# Allegro board oh0.brd
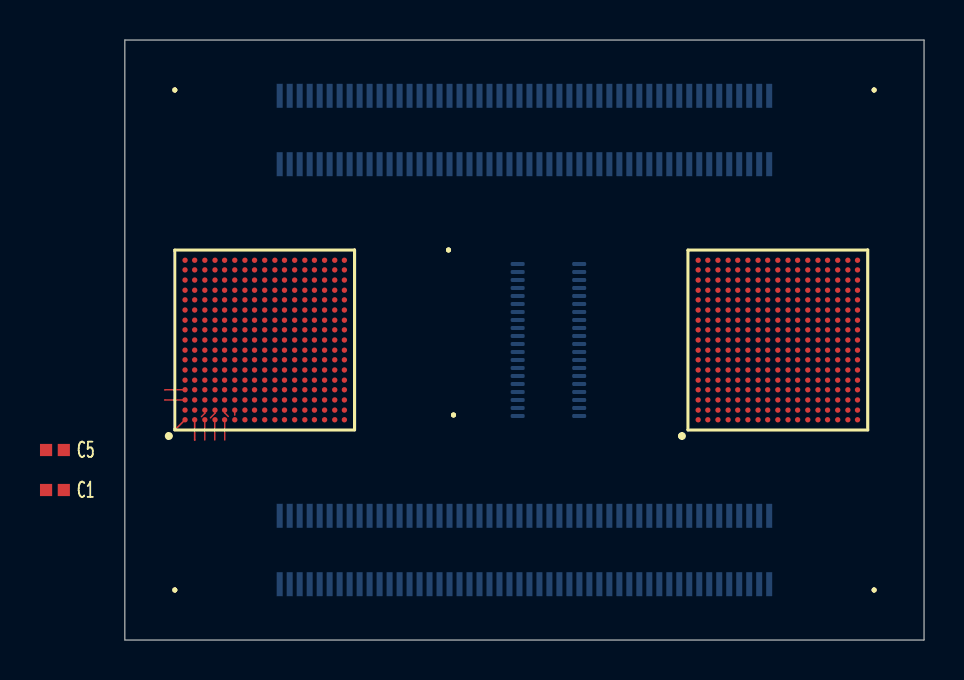
[diagram p0: board, top side]
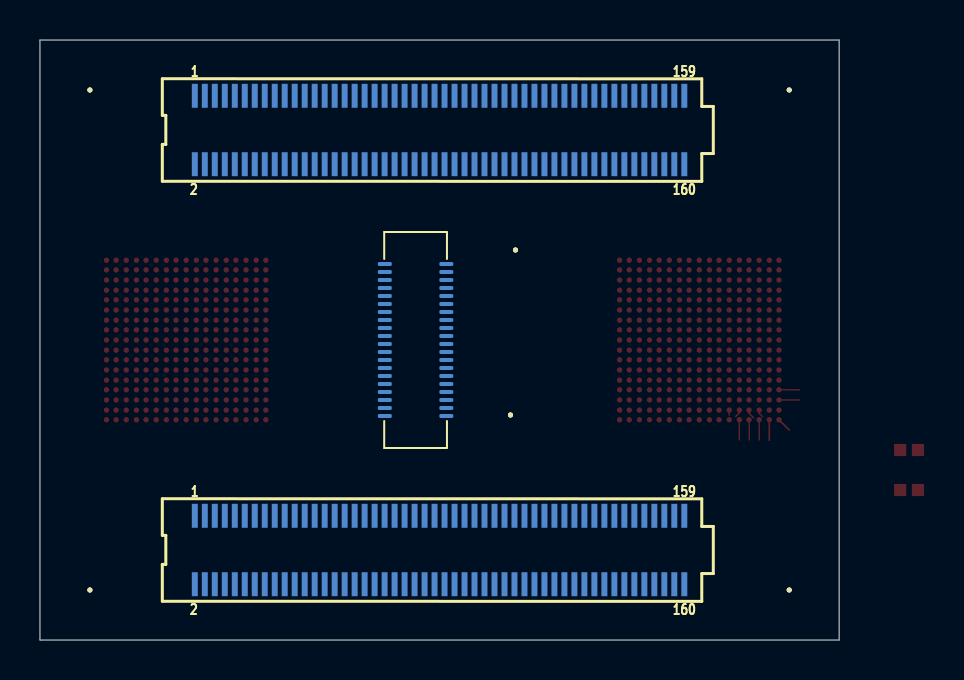
[diagram p1: board, bottom side, seen from below]

Outline 40 x 30 mm; copper layers: TOP, LAYER_1, LAYER_2, LAYER_3, LAYER_4, BOTTOM. Coordinates in mm from the lower left corner of the outline.
Outline path: 0,30 0,0 40,0 40,30 0,30

## Design rules (mm)
constraint set DEFAULT: min track width 0.082
net group DCLK0: nets DCLK_N0_LPGBTS1_LPGBT DCLK_P0_LPGBTS1_LPGBT1
net group DCLK1: nets DCLK_N1_LPGBTS1_LPGBT DCLK_P1_LPGBTS1_LPGBT1
net group DCLK2: nets DCLK_N2_LPGBTS1_LPGBT DCLK_P2_LPGBTS1_LPGBT1
net group DCLK3: nets DCLK_N3_LPGBTS1_LPGBT DCLK_P3_LPGBTS1_LPGBT1
net group DCLK4: nets DCLK_N4_LPGBTS1_LPGBT DCLK_P4_LPGBTS1_LPGBT1
net group DCLK5: nets DCLK_N5_LPGBTS1_LPGBT DCLK_P5_LPGBTS1_LPGBT1
net group DCLK6: nets DCLK_N6_LPGBTS1_LPGBT DCLK_P6_LPGBTS1_LPGBT1
net group DCLK7: nets DCLK_N7_LPGBTS1_LPGBT DCLK_P7_LPGBTS1_LPGBT1
net group DCLK8: nets DCLK_N8_LPGBTS1_LPGBT DCLK_P8_LPGBTS1_LPGBT1
net group DCLK9: nets DCLK_N9_LPGBTS1_LPGBT DCLK_P9_LPGBTS1_LPGBT1
net group DCLK10: nets DCLK_N10_LPGBTS1_LPGBT DCLK_P10_LPGBTS1_LPGBT1
net group DCLK11: nets DCLK_N11_LPGBTS1_LPGBT DCLK_P11_LPGBTS1_LPGBT1
net group DCLK12: nets DCLK_N12_LPGBTS1_LPGBT DCLK_P12_LPGBTS1_LPGBT1
net group DCLK13: nets DCLK_N13_LPGBTS1_LPGBT DCLK_P13_LPGBTS1_LPGBT1
net group DCLK14: nets DCLK_N14_LPGBTS1_LPGBT DCLK_P14_LPGBTS1_LPGBT1
net group DCLK15: nets DCLK_N15_LPGBTS1_LPGBT DCLK_P15_LPGBTS1_LPGBT1
net group DCLK16: nets DCLK_N16_LPGBTS1_LPGBT DCLK_P16_LPGBTS1_LPGBT1
net group DCLK17: nets DCLK_N17_LPGBTS1_LPGBT DCLK_P17_LPGBTS1_LPGBT1
net group DCLK18: nets DCLK_N18_LPGBTS1_LPGBT DCLK_P18_LPGBTS1_LPGBT1
net group DCLK19: nets DCLK_N19_LPGBTS1_LPGBT DCLK_P19_LPGBTS1_LPGBT1
net group DCLK20: nets DCLK_N20_LPGBTS1_LPGBT DCLK_P20_LPGBTS1_LPGBT1
net group DCLK21: nets DCLK_N21_LPGBTS1_LPGBT DCLK_P21_LPGBTS1_LPGBT1
net group DCLK22: nets DCLK_N22_LPGBTS1_LPGBT DCLK_P22_LPGBTS1_LPGBT1
net group DCLK23: nets DCLK_N23_LPGBTS1_LPGBT DCLK_P23_LPGBTS1_LPGBT1
net group DCLK24: nets DCLK_N24_LPGBTS1_LPGBT DCLK_P24_LPGBTS1_LPGBT1
net group DCLK25: nets DCLK_N25_LPGBTS1_LPGBT DCLK_P25_LPGBTS1_LPGBT1
net group DCLK26: nets DCLK_N26_LPGBTS1_LPGBT DCLK_P26_LPGBTS1_LPGBT1
net group DCLK27: nets DCLK_N27_LPGBTS1_LPGBT DCLK_P27_LPGBTS1_LPGBT1
net group ELINK_I_MASTER0: nets ELINK_I_MASTER_N0 ELINK_I_MASTER_P0
net group ELINK_I_MASTER1: nets ELINK_I_MASTER_N1 ELINK_I_MASTER_P1
net group ELINK_I_MASTER2: nets ELINK_I_MASTER_N2 ELINK_I_MASTER_P2
net group ELINK_I_MASTER3: nets ELINK_I_MASTER_N3 ELINK_I_MASTER_P3
net group ELINK_I_MASTER4: nets ELINK_I_MASTER_N4 ELINK_I_MASTER_P4
net group ELINK_I_MASTER5: nets ELINK_I_MASTER_N5 ELINK_I_MASTER_P5
net group ELINK_I_MASTER6: nets ELINK_I_MASTER_N6 ELINK_I_MASTER_P6
net group ELINK_I_MASTER7: nets ELINK_I_MASTER_N7 ELINK_I_MASTER_P7
net group ELINK_I_MASTER8: nets ELINK_I_MASTER_N8 ELINK_I_MASTER_P8
net group ELINK_I_MASTER9: nets ELINK_I_MASTER_N9 ELINK_I_MASTER_P9
net group ELINK_I_MASTER10: nets ELINK_I_MASTER_N10 ELINK_I_MASTER_P10
net group ELINK_I_MASTER11: nets ELINK_I_MASTER_N11 ELINK_I_MASTER_P11
net group ELINK_I_MASTER12: nets ELINK_I_MASTER_N12 ELINK_I_MASTER_P12
net group ELINK_I_MASTER13: nets ELINK_I_MASTER_N13 ELINK_I_MASTER_P13
net group ELINK_I_MASTER14: nets ELINK_I_MASTER_N14 ELINK_I_MASTER_P14
net group ELINK_I_MASTER15: nets ELINK_I_MASTER_N15 ELINK_I_MASTER_P15
net group ELINK_I_MASTER16: nets ELINK_I_MASTER_N16 ELINK_I_MASTER_P16
net group ELINK_I_MASTER17: nets ELINK_I_MASTER_N17 ELINK_I_MASTER_P17
net group ELINK_I_MASTER18: nets ELINK_I_MASTER_N18 ELINK_I_MASTER_P18
net group ELINK_I_MASTER19: nets ELINK_I_MASTER_N19 ELINK_I_MASTER_P19
net group ELINK_I_MASTER20: nets ELINK_I_MASTER_N20 ELINK_I_MASTER_P20
net group ELINK_I_MASTER21: nets ELINK_I_MASTER_N21 ELINK_I_MASTER_P21
net group ELINK_I_MASTER22: nets ELINK_I_MASTER_N22 ELINK_I_MASTER_P22
net group ELINK_I_MASTER23: nets ELINK_I_MASTER_N23 ELINK_I_MASTER_P23
net group ELINK_I_MASTER24: nets ELINK_I_MASTER_N24 ELINK_I_MASTER_P24
net group ELINK_I_MASTER25: nets ELINK_I_MASTER_N25 ELINK_I_MASTER_P25
net group ELINK_I_MASTER26: nets ELINK_I_MASTER_N26 ELINK_I_MASTER_P26
net group ELINK_I_MASTER27: nets ELINK_I_MASTER_N27 ELINK_I_MASTER_P27
net group ELINK_I_SLAVE0: nets ELINK_I_SLAVE_N0 ELINK_I_SLAVE_P0
net group ELINK_I_SLAVE1: nets ELINK_I_SLAVE_N1 ELINK_I_SLAVE_P1
net group ELINK_I_SLAVE2: nets ELINK_I_SLAVE_N2 ELINK_I_SLAVE_P2
net group ELINK_I_SLAVE3: nets ELINK_I_SLAVE_N3 ELINK_I_SLAVE_P3
net group ELINK_I_SLAVE4: nets ELINK_I_SLAVE_N4 ELINK_I_SLAVE_P4
net group ELINK_I_SLAVE5: nets ELINK_I_SLAVE_N5 ELINK_I_SLAVE_P5
net group ELINK_I_SLAVE6: nets ELINK_I_SLAVE_N6 ELINK_I_SLAVE_P6
net group ELINK_I_SLAVE7: nets ELINK_I_SLAVE_N7 ELINK_I_SLAVE_P7
net group ELINK_I_SLAVE8: nets ELINK_I_SLAVE_N8 ELINK_I_SLAVE_P8
net group ELINK_I_SLAVE9: nets ELINK_I_SLAVE_N9 ELINK_I_SLAVE_P9
net group ELINK_I_SLAVE10: nets ELINK_I_SLAVE_N10 ELINK_I_SLAVE_P10
net group ELINK_I_SLAVE11: nets ELINK_I_SLAVE_N11 ELINK_I_SLAVE_P11
net group ELINK_I_SLAVE12: nets ELINK_I_SLAVE_N12 ELINK_I_SLAVE_P12
net group ELINK_I_SLAVE13: nets ELINK_I_SLAVE_N13 ELINK_I_SLAVE_P13
net group ELINK_I_SLAVE14: nets ELINK_I_SLAVE_N14 ELINK_I_SLAVE_P14
net group ELINK_I_SLAVE15: nets ELINK_I_SLAVE_N15 ELINK_I_SLAVE_P15
net group ELINK_I_SLAVE16: nets ELINK_I_SLAVE_N16 ELINK_I_SLAVE_P16
net group ELINK_I_SLAVE17: nets ELINK_I_SLAVE_N17 ELINK_I_SLAVE_P17
net group ELINK_I_SLAVE18: nets ELINK_I_SLAVE_N18 ELINK_I_SLAVE_P18
net group ELINK_I_SLAVE19: nets ELINK_I_SLAVE_N19 ELINK_I_SLAVE_P19
net group ELINK_I_SLAVE20: nets ELINK_I_SLAVE_N20 ELINK_I_SLAVE_P20
net group ELINK_I_SLAVE21: nets ELINK_I_SLAVE_N21 ELINK_I_SLAVE_P21
net group ELINK_I_SLAVE22: nets ELINK_I_SLAVE_N22 ELINK_I_SLAVE_P22
net group ELINK_I_SLAVE23: nets ELINK_I_SLAVE_N23 ELINK_I_SLAVE_P23
net group ELINK_I_SLAVE24: nets ELINK_I_SLAVE_N24 ELINK_I_SLAVE_P24
net group ELINK_I_SLAVE25: nets ELINK_I_SLAVE_N25 ELINK_I_SLAVE_P25
net group ELINK_I_SLAVE26: nets ELINK_I_SLAVE_N26 ELINK_I_SLAVE_P26
net group ELINK_I_SLAVE27: nets ELINK_I_SLAVE_N27 ELINK_I_SLAVE_P27
net group ELINK_O0: nets ELINK_O_P0_LPGBTS1 ELINK_O_P0_LPGBTS1_LPGBT1
net group ELINK_O1: nets ELINK_O_P1_LPGBTS1 ELINK_O_P1_LPGBTS1_LPGBT1
net group ELINK_O2: nets ELINK_O_P2_LPGBTS1 ELINK_O_P2_LPGBTS1_LPGBT1
net group ELINK_O3: nets ELINK_O_P3_LPGBTS1 ELINK_O_P3_LPGBTS1_LPGBT1
net group ELINK_O4: nets ELINK_O_P4_LPGBTS1 ELINK_O_P4_LPGBTS1_LPGBT1
net group ELINK_O5: nets ELINK_O_P5_LPGBTS1 ELINK_O_P5_LPGBTS1_LPGBT1
net group ELINK_O6: nets ELINK_O_P6_LPGBTS1 ELINK_O_P6_LPGBTS1_LPGBT1
net group ELINK_O7: nets ELINK_O_P7_LPGBTS1 ELINK_O_P7_LPGBTS1_LPGBT1
net group ELINK_O8: nets ELINK_O_P8_LPGBTS1 ELINK_O_P8_LPGBTS1_LPGBT1
net group ELINK_O9: nets ELINK_O_P9_LPGBTS1 ELINK_O_P9_LPGBTS1_LPGBT1
net group ELINK_O10: nets ELINK_O_P10_LPGBTS1 ELINK_O_P10_LPGBTS1_LPGBT1
net group ELINK_O11: nets ELINK_O_P11_LPGBTS1 ELINK_O_P11_LPGBTS1_LPGBT1
net group ELINK_O12: nets ELINK_O_P12_LPGBTS1 ELINK_O_P12_LPGBTS1_LPGBT1
net group ELINK_O13: nets ELINK_O_P13_LPGBTS1 ELINK_O_P13_LPGBTS1_LPGBT1
net group ELINK_O14: nets ELINK_O_P14_LPGBTS1 ELINK_O_P14_LPGBTS1_LPGBT1
net group ELINK_O15: nets ELINK_O_P15_LPGBTS1 ELINK_O_P15_LPGBTS1_LPGBT1
net group MASTER_CLOCK0: nets MASTER_CLOCK_P0_BASEBOARD MASTER_CLOCK_P0_LPGBTS1
net group MASTER_CLOCK1: nets MASTER_CLOCK_P1_BASEBOARD MASTER_CLOCK_P1_LPGBTS1
net group MASTER_CLOCK2: nets MASTER_CLOCK_P2_BASEBOARD MASTER_CLOCK_P2_LPGBTS1
net group MASTER_TX: nets MASTER_TX_N MASTER_TX_P
net group REFCLK: nets REFCLK_N REFCLK_P
net group RX: nets RX_N RX_P
net group SCIN: nets SCIN_N SCIN_P
net group SCOUT: nets SCOUT_N SCOUT_P
net group SLAVE_CLOCK1: nets SLAVE_CLOCK_N1 SLAVE_CLOCK_P1
net group SLAVE_CLOCK2: nets SLAVE_CLOCK_N2 SLAVE_CLOCK_P2
net group SLAVE_TX: nets SLAVE_TX_N SLAVE_TX_P
net group SLOW_CONTROL: nets SLOW_CONTROL_N SLOW_CONTROL_P
net group ELINKS: nets ELINK_O_N0_LPGBTS1 ELINK_O_N0_LPGBTS1_LPGBT1 ELINK_O_N1_LPGBTS1 ELINK_O_N1_LPGBTS1_LPGBT1 ELINK_O_N2_LPGBTS1 ELINK_O_N2_LPGBTS1_LPGBT1 ELINK_O_N3_LPGBTS1 ELINK_O_N3_LPGBTS1_LPGBT1 ELINK_O_N4_LPGBTS1 ELINK_O_N4_LPGBTS1_LPGBT1 ELINK_O_N5_LPGBTS1 ELINK_O_N5_LPGBTS1_LPGBT1 ELINK_O_N6_LPGBTS1 ELINK_O_N6_LPGBTS1_LPGBT1 ELINK_O_N7_LPGBTS1 ELINK_O_N7_LPGBTS1_LPGBT1 ELINK_O_N8_LPGBTS1 ELINK_O_N8_LPGBTS1_LPGBT1 ELINK_O_N9_LPGBTS1 ELINK_O_N9_LPGBTS1_LPGBT1 ELINK_O_N10_LPGBTS1 ELINK_O_N10_LPGBTS1_LPGBT1 ELINK_O_N11_LPGBTS1 ELINK_O_N11_LPGBTS1_LPGBT1 ELINK_O_N12_LPGBTS1 ELINK_O_N12_LPGBTS1_LPGBT1 ELINK_O_N13_LPGBTS1 ELINK_O_N13_LPGBTS1_LPGBT1 ELINK_O_N14_LPGBTS1 ELINK_O_N14_LPGBTS1_LPGBT1 ELINK_O_N15_LPGBTS1 ELINK_O_N15_LPGBTS1_LPGBT1

## Placement (name value [footprint] x y rotation side)
C1  4.7 uF  [C0402]  -3.5 7.5 0 top
C5  4.7 uF  [C0402]  -3.5 9.5 0 top
J3  VTRX+  [DF40C-2P0-40DS]  21.2 15 180 bottom
J4  ST5-50-1.50-L-D-P  [ST5-50-1_50-X-D]  20 4.5 180 bottom
J5  ST5-50-1.50-L-D-P  [ST5-50-1_50-X-D]  20 25.5 180 bottom
M1  -  [SMTSO-M1-2ET]  16.2 19.5 270 bottom
M2  -  [SMTSO-M1-2ET]  16.45 11.25 270 bottom
NOREF  -  []  0 30 0 top
NOREF#2  -  []  0 0 90 top
NOREF#3  -  [unnamed#2]  2.5 27.5 180 bottom
NOREF#4  -  [unnamed#2]  37.5 2.5 180 bottom
NOREF#5  -  [unnamed#2]  37.5 27.5 180 bottom
NOREF#6  -  [unnamed#2]  2.5 2.5 180 bottom
U1  LpGBT  [LPGBT_WIZ]  32.68 15 180 top
U2  LpGBT  [LPGBT_WIZ]  7 15 180 top

## Library data of the parts
C1 C5 = CAP NP
J3 = VTRX+
J4 J5 = ST5-50-X-Y-Z
M1 M2 = SMTSO-M1-2ET
U1 U2 = LpGBT

## Footprints (pads in the part's own frame, mm; a bottom-side part is the same pattern mirrored in y, then rotated)
C0402
  rect 0.61x0.61 smd: 1(-0.445,0) 2(0.445,0)
DF40C-2P0-40DS
  rrect 0.7x0.2 smd: 1(-1.54,3.8) 2(1.54,3.8) 3(-1.54,3.4) 4(1.54,3.4) 5(-1.54,3) 6(1.54,3) 7(-1.54,2.6) 8(1.54,2.6) 9(-1.54,2.2) 10(1.54,2.2) 11(-1.54,1.8) 12(1.54,1.8) 13(-1.54,1.4) 14(1.54,1.4) 15(-1.54,1) 16(1.54,1) 17(-1.54,0.6) 18(1.54,0.6) 19(-1.54,0.2) 20(1.54,0.2) 21(-1.54,-0.2) 22(1.54,-0.2) 23(-1.54,-0.6) 24(1.54,-0.6) 25(-1.54,-1) 26(1.54,-1) 27(-1.54,-1.4) 28(1.54,-1.4) 29(-1.54,-1.8) 30(1.54,-1.8) 31(-1.54,-2.2) 32(1.54,-2.2) 33(-1.54,-2.6) 34(1.54,-2.6) 35(-1.54,-3) 36(1.54,-3) 37(-1.54,-3.4) 38(1.54,-3.4) 39(-1.54,-3.8) 40(1.54,-3.8)
LPGBT_WIZ
  round 0.269 smd: A1(3.988,3.988) A2(3.505,3.988) A3(2.997,3.988) A4(2.489,3.988) A5(2.007,3.988) A6(1.499,3.988) A7(0.991,3.988) A8(0.508,3.988) A9(0,3.988) A10(-0.508,3.988) A11(-0.991,3.988) A12(-1.499,3.988) A13(-2.007,3.988) A14(-2.489,3.988) A15(-2.997,3.988) A16(-3.505,3.988) A17(-3.988,3.988) B1(3.988,3.505) B2(3.505,3.505) B3(2.997,3.505) B4(2.489,3.505) B5(2.007,3.505) B6(1.499,3.505) B7(0.991,3.505) B8(0.508,3.505) B9(0,3.505) B10(-0.508,3.505) B11(-0.991,3.505) B12(-1.499,3.505) B13(-2.007,3.505) B14(-2.489,3.505) B15(-2.997,3.505) B16(-3.505,3.505) B17(-3.988,3.505) C1(3.988,2.997) C2(3.505,2.997) C3(2.997,2.997) C4(2.489,2.997) C5(2.007,2.997) C6(1.499,2.997) C7(0.991,2.997) C8(0.508,2.997) C9(0,2.997) C10(-0.508,2.997) C11(-0.991,2.997) C12(-1.499,2.997) C13(-2.007,2.997) C14(-2.489,2.997) C15(-2.997,2.997) C16(-3.505,2.997) C17(-3.988,2.997) D1(3.988,2.489) D2(3.505,2.489) D3(2.997,2.489) D4(2.489,2.489) D5(2.007,2.489) D6(1.499,2.489) D7(0.991,2.489) D8(0.508,2.489) D9(0,2.489) D10(-0.508,2.489) D11(-0.991,2.489) D12(-1.499,2.489) D13(-2.007,2.489) D14(-2.489,2.489) D15(-2.997,2.489) D16(-3.505,2.489) D17(-3.988,2.489) E1(3.988,2.007) E2(3.505,2.007) E3(2.997,2.007) E4(2.489,2.007) E5(2.007,2.007) E6(1.499,2.007) E7(0.991,2.007) E8(0.508,2.007) E9(0,2.007) E10(-0.508,2.007) E11(-0.991,2.007) E12(-1.499,2.007) E13(-2.007,2.007) E14(-2.489,2.007) E15(-2.997,2.007) E16(-3.505,2.007) E17(-3.988,2.007) F1(3.988,1.499) F2(3.505,1.499) F3(2.997,1.499) F4(2.489,1.499) F5(2.007,1.499) F6(1.499,1.499) F7(0.991,1.499) F8(0.508,1.499) F9(0,1.499) F10(-0.508,1.499) F11(-0.991,1.499) F12(-1.499,1.499) F13(-2.007,1.499) F14(-2.489,1.499) F15(-2.997,1.499) F16(-3.505,1.499) F17(-3.988,1.499) G1(3.988,0.991) G2(3.505,0.991) G3(2.997,0.991) G4(2.489,0.991) G5(2.007,0.991) G6(1.499,0.991) G7(0.991,0.991) G8(0.508,0.991) G9(0,0.991) G10(-0.508,0.991) G11(-0.991,0.991) G12(-1.499,0.991) G13(-2.007,0.991) G14(-2.489,0.991) G15(-2.997,0.991) G16(-3.505,0.991) G17(-3.988,0.991) H1(3.988,0.508) H2(3.505,0.508) H3(2.997,0.508) H4(2.489,0.508) H5(2.007,0.508) H6(1.499,0.508) H7(0.991,0.508) H8(0.508,0.508) H9(0,0.508) H10(-0.508,0.508) H11(-0.991,0.508) H12(-1.499,0.508) H13(-2.007,0.508) H14(-2.489,0.508) H15(-2.997,0.508) H16(-3.505,0.508) H17(-3.988,0.508) J1(3.988,0) J2(3.505,0) J3(2.997,0) J4(2.489,0) J5(2.007,0) J6(1.499,0) J7(0.991,0) J8(0.508,0) J9(0,0) J10(-0.508,0) J11(-0.991,0) J12(-1.499,0) J13(-2.007,0) J14(-2.489,0) J15(-2.997,0) J16(-3.505,0) J17(-3.988,0) K1(3.988,-0.508) K2(3.505,-0.508) K3(2.997,-0.508) K4(2.489,-0.508) K5(2.007,-0.508) K6(1.499,-0.508) K7(0.991,-0.508) K8(0.508,-0.508) K9(0,-0.508) K10(-0.508,-0.508) K11(-0.991,-0.508) K12(-1.499,-0.508) K13(-2.007,-0.508) K14(-2.489,-0.508) K15(-2.997,-0.508) K16(-3.505,-0.508) K17(-3.988,-0.508) L1(3.988,-0.991) L2(3.505,-0.991) L3(2.997,-0.991) L4(2.489,-0.991) L5(2.007,-0.991) L6(1.499,-0.991) L7(0.991,-0.991) L8(0.508,-0.991) L9(0,-0.991) L10(-0.508,-0.991) L11(-0.991,-0.991) L12(-1.499,-0.991) L13(-2.007,-0.991) L14(-2.489,-0.991) L15(-2.997,-0.991) L16(-3.505,-0.991) L17(-3.988,-0.991) M1(3.988,-1.499) M2(3.505,-1.499) M3(2.997,-1.499) M4(2.489,-1.499) M5(2.007,-1.499) M6(1.499,-1.499) M7(0.991,-1.499) M8(0.508,-1.499) M9(0,-1.499) M10(-0.508,-1.499) M11(-0.991,-1.499) M12(-1.499,-1.499) M13(-2.007,-1.499) M14(-2.489,-1.499) M15(-2.997,-1.499) M16(-3.505,-1.499) M17(-3.988,-1.499) N1(3.988,-2.007) N2(3.505,-2.007) N3(2.997,-2.007) N4(2.489,-2.007) N5(2.007,-2.007) N6(1.499,-2.007) N7(0.991,-2.007) N8(0.508,-2.007) N9(0,-2.007) N10(-0.508,-2.007) N11(-0.991,-2.007) N12(-1.499,-2.007) N13(-2.007,-2.007) N14(-2.489,-2.007) N15(-2.997,-2.007) N16(-3.505,-2.007) N17(-3.988,-2.007) P1(3.988,-2.489) P2(3.505,-2.489) P3(2.997,-2.489) P4(2.489,-2.489) P5(2.007,-2.489) P6(1.499,-2.489) P7(0.991,-2.489) P8(0.508,-2.489) P9(0,-2.489) P10(-0.508,-2.489) P11(-0.991,-2.489) P12(-1.499,-2.489) P13(-2.007,-2.489) P14(-2.489,-2.489) P15(-2.997,-2.489) P16(-3.505,-2.489) P17(-3.988,-2.489) R1(3.988,-2.997) R2(3.505,-2.997) R3(2.997,-2.997) R4(2.489,-2.997) R5(2.007,-2.997) R6(1.499,-2.997) R7(0.991,-2.997) R8(0.508,-2.997) R9(0,-2.997) R10(-0.508,-2.997) R11(-0.991,-2.997) R12(-1.499,-2.997) R13(-2.007,-2.997) R14(-2.489,-2.997) R15(-2.997,-2.997) R16(-3.505,-2.997) R17(-3.988,-2.997) T1(3.988,-3.505) T2(3.505,-3.505) T3(2.997,-3.505) T4(2.489,-3.505) T5(2.007,-3.505) T6(1.499,-3.505) T7(0.991,-3.505) T8(0.508,-3.505) T9(0,-3.505) T10(-0.508,-3.505) T11(-0.991,-3.505) T12(-1.499,-3.505) T13(-2.007,-3.505) T14(-2.489,-3.505) T15(-2.997,-3.505) T16(-3.505,-3.505) T17(-3.988,-3.505) U1(3.988,-3.988) U2(3.505,-3.988) U3(2.997,-3.988) U4(2.489,-3.988) U5(2.007,-3.988) U6(1.499,-3.988) U7(0.991,-3.988) U8(0.508,-3.988) U9(0,-3.988) U10(-0.508,-3.988) U11(-0.991,-3.988) U12(-1.499,-3.988) U13(-2.007,-3.988) U14(-2.489,-3.988) U15(-2.997,-3.988) U16(-3.505,-3.988) U17(-3.988,-3.988)
SMTSO-M1-2ET
  round 0.254 hole 2.489: 1(0,0)
ST5-50-1_50-X-D
  rect 0.3x1.2 smd: 1(-12.25,1.71) 2(-12.25,-1.71) 3(-11.75,1.71) 4(-11.75,-1.71) 5(-11.25,1.71) 6(-11.25,-1.71) 7(-10.75,1.71) 8(-10.75,-1.71) 9(-10.25,1.71) 10(-10.25,-1.71) 11(-9.75,1.71) 12(-9.75,-1.71) 13(-9.25,1.71) 14(-9.25,-1.71) 15(-8.75,1.71) 16(-8.75,-1.71) 17(-8.25,1.71) 18(-8.25,-1.71) 19(-7.75,1.71) 20(-7.75,-1.71) 21(-7.25,1.71) 22(-7.25,-1.71) 23(-6.75,1.71) 24(-6.75,-1.71) 25(-6.25,1.71) 26(-6.25,-1.71) 27(-5.75,1.71) 28(-5.75,-1.71) 29(-5.25,1.71) 30(-5.25,-1.71) 31(-4.75,1.71) 32(-4.75,-1.71) 33(-4.25,1.71) 34(-4.25,-1.71) 35(-3.75,1.71) 36(-3.75,-1.71) 37(-3.25,1.71) 38(-3.25,-1.71) 39(-2.75,1.71) 40(-2.75,-1.71) 41(-2.25,1.71) 42(-2.25,-1.71) 43(-1.75,1.71) 44(-1.75,-1.71) 45(-1.25,1.71) 46(-1.25,-1.71) 47(-0.75,1.71) 48(-0.75,-1.71) 49(-0.25,1.71) 50(-0.25,-1.71) 51(0.25,1.71) 52(0.25,-1.71) 53(0.75,1.71) 54(0.75,-1.71) 55(1.25,1.71) 56(1.25,-1.71) 57(1.75,1.71) 58(1.75,-1.71) 59(2.25,1.71) 60(2.25,-1.71) 61(2.75,1.71) 62(2.75,-1.71) 63(3.25,1.71) 64(3.25,-1.71) 65(3.75,1.71) 66(3.75,-1.71) 67(4.25,1.71) 68(4.25,-1.71) 69(4.75,1.71) 70(4.75,-1.71) 71(5.25,1.71) 72(5.25,-1.71) 73(5.75,1.71) 74(5.75,-1.71) 75(6.25,1.71) 76(6.25,-1.71) 77(6.75,1.71) 78(6.75,-1.71) 79(7.25,1.71) 80(7.25,-1.71) 81(7.75,1.71) 82(7.75,-1.71) 83(8.25,1.71) 84(8.25,-1.71) 85(8.75,1.71) 86(8.75,-1.71) 87(9.25,1.71) 88(9.25,-1.71) 89(9.75,1.71) 90(9.75,-1.71) 91(10.25,1.71) 92(10.25,-1.71) 93(10.75,1.71) 94(10.75,-1.71) 95(11.25,1.71) 96(11.25,-1.71) 97(11.75,1.71) 98(11.75,-1.71) 99(12.25,1.71) 100(12.25,-1.71)
unnamed#2
  round 0.254 hole 2.489: 1(0,0)

## Nets
+1V2: C5.1 J4.26 J4.28 J4.30 J4.32 J4.34 J4.36 J4.38 J4.40 U1.F3 U1.G3 U1.H3 U1.J3 U1.J5 U1.J6 U1.J7 U1.J8 U1.J9 U1.J11 U1.K3 U1.K6 U1.K7 U1.K8 U1.K9 U1.K11 U1.K12 U1.K13 U1.L3 U1.L10 U1.L11 U1.L12 U1.L13 U1.M3 U1.M12 U1.M13 U1.N3 U2.F3 U2.G3 U2.H3 U2.J3 U2.J5 U2.J6 U2.J7 U2.J8 U2.J9 U2.J11 U2.K3 U2.K6 U2.K7 U2.K8 U2.K9 U2.K11 U2.K12 U2.K13 U2.L3 U2.L10 U2.L11 U2.L12 U2.L13 U2.M3 U2.M12 U2.M13 U2.N3
+2V5: J4.58 J4.60 J4.62 J4.64 J4.66 J4.68 J4.70 J4.72
GND: C1.2 C5.2 J4.14 J4.24 J4.42 J4.43 J4.44 J4.46 J4.48 J4.49 J4.50 J4.52 J4.54 J4.56 J4.74 J4.76 J4.78 J4.80 J4.82 J4.84 J4.86 J4.88 J4.93 J4.99 J5.43 J5.44 J5.49 J5.50 J5.94 J5.99 U1.F1 U1.F2 U1.F4 U1.G2 U1.G4 U1.G6 U1.G7 U1.G8 U1.G9 U1.G10 U1.G11 U1.G12 U1.G13 U1.H2 U1.H5 U1.H6 U1.H7 U1.H8 U1.H9 U1.H10 U1.H11 U1.H12 U1.H13 U1.J1 U1.J2(VSSTX#J2) U1.J12 U1.J13 U1.K1 U1.K2 U1.L2 U1.M2 U1.N1 U1.N2 U2.F1 U2.F2 U2.F4 U2.G2 U2.G4 U2.G6 U2.G7 U2.G8 U2.G9 U2.G10 U2.G11 U2.G12 U2.G13 U2.H2 U2.H5 U2.H6 U2.H7 U2.H8 U2.H9 U2.H10 U2.H11 U2.H12 U2.H13 U2.J1 U2.J2(VSSTX#J2) U2.J12 U2.J13 U2.K1 U2.K2 U2.L2 U2.M2 U2.N1 U2.N2
GND_SIGNAL: J3.5 J3.6 J3.11 J3.12 J3.17 J3.18 J3.23 J3.24 J3.29 J3.30 J3.35 J3.36 M1.1 M2.1
VDDADC: U1.E3 U1.E4 U2.E3 U2.E4
ADC_IN0: U1.D1
ADC_IN0_LPGBTS1_LPGBT1: U2.A2
ADC_IN1: J3.4 U1.C1
ADC_IN1_LPGBTS1_LPGBT1: U2.A1
ADC_IN2: U1.C2
ADC_IN2_LPGBTS1_LPGBT1: U2.B2
ADC_IN3: U1.C3
ADC_IN3_LPGBTS1_LPGBT1: U2.B1
ADC_IN4: J4.16 U1.B1
ADC_IN4_LPGBTS1_LPGBT1: U2.C3
ADC_IN5: J4.18 U1.B2
ADC_IN5_LPGBTS1_LPGBT1: U2.C2
ADC_IN6: J4.20 U1.A1
ADC_IN6_LPGBTS1_LPGBT1: U2.C1
ADC_IN7: J4.22 U1.A2
ADC_IN7_LPGBTS1_LPGBT1: U2.D1
DAC_OUT: U1.D2
DCLK_N0_LPGBTS1_LPGBT: U1.U4
DCLK_N0_LPGBTS1_LPGBT1: U2.U4
DCLK_N1_LPGBTS1_LPGBT: U1.R4
DCLK_N1_LPGBTS1_LPGBT1: U2.R4
DCLK_N2_LPGBTS1_LPGBT: U1.U9
DCLK_N2_LPGBTS1_LPGBT1: U2.U9
DCLK_N3_LPGBTS1_LPGBT: U1.U10
DCLK_N3_LPGBTS1_LPGBT1: U2.U10
DCLK_N4_LPGBTS1_LPGBT: U1.R13
DCLK_N4_LPGBTS1_LPGBT1: U2.R13
DCLK_N5_LPGBTS1_LPGBT: U1.R14
DCLK_N5_LPGBTS1_LPGBT1: U2.R14
DCLK_N6_LPGBTS1_LPGBT: U1.U15
DCLK_N6_LPGBTS1_LPGBT1: U2.U15
DCLK_N7_LPGBTS1_LPGBT: U1.R15
DCLK_N7_LPGBTS1_LPGBT1: U2.R15
DCLK_N8_LPGBTS1_LPGBT: U1.N15
DCLK_N8_LPGBTS1_LPGBT1: U2.N15
DCLK_N9_LPGBTS1_LPGBT: U1.M15
DCLK_N9_LPGBTS1_LPGBT1: U2.M15
DCLK_N10_LPGBTS1_LPGBT: U1.L15
DCLK_N10_LPGBTS1_LPGBT1: U2.L15
DCLK_N11_LPGBTS1_LPGBT: U1.K17
DCLK_N11_LPGBTS1_LPGBT1: U2.K17
DCLK_N12_LPGBTS1_LPGBT: U1.J17
DCLK_N12_LPGBTS1_LPGBT1: U2.J17
DCLK_N13_LPGBTS1_LPGBT: U1.K15
DCLK_N13_LPGBTS1_LPGBT1: U2.K15
DCLK_N14_LPGBTS1_LPGBT: U1.J15
DCLK_N14_LPGBTS1_LPGBT1: U2.J15
DCLK_N15_LPGBTS1_LPGBT: U1.H15
DCLK_N15_LPGBTS1_LPGBT1: U2.H15
DCLK_N16_LPGBTS1_LPGBT: U1.G15
DCLK_N16_LPGBTS1_LPGBT1: U2.G15
DCLK_N17_LPGBTS1_LPGBT: U1.F15
DCLK_N17_LPGBTS1_LPGBT1: U2.F15
DCLK_N18_LPGBTS1_LPGBT: U1.E15
DCLK_N18_LPGBTS1_LPGBT1: U2.E15
DCLK_N19_LPGBTS1_LPGBT: U1.D17
DCLK_N19_LPGBTS1_LPGBT1: U2.D17
DCLK_N20_LPGBTS1_LPGBT: U1.D15
DCLK_N20_LPGBTS1_LPGBT1: U2.D15
DCLK_N21_LPGBTS1_LPGBT: U1.C17
DCLK_N21_LPGBTS1_LPGBT1: U2.C17
DCLK_N22_LPGBTS1_LPGBT: U1.B17
DCLK_N22_LPGBTS1_LPGBT1: U2.B17
DCLK_N23_LPGBTS1_LPGBT: U1.A17
DCLK_N23_LPGBTS1_LPGBT1: U2.A17
DCLK_N24_LPGBTS1_LPGBT: U1.C15
DCLK_N24_LPGBTS1_LPGBT1: U2.C15
DCLK_N25_LPGBTS1_LPGBT: U1.A15
DCLK_N25_LPGBTS1_LPGBT1: U2.A15
DCLK_N26_LPGBTS1_LPGBT: U1.C5
DCLK_N26_LPGBTS1_LPGBT1: U2.C5
DCLK_N27_LPGBTS1_LPGBT: U1.C4
DCLK_N27_LPGBTS1_LPGBT1: U2.C4
DCLK_P0_LPGBTS1_LPGBT: U1.T4
DCLK_P0_LPGBTS1_LPGBT1: U2.T4
DCLK_P1_LPGBTS1_LPGBT: U1.P4
DCLK_P1_LPGBTS1_LPGBT1: U2.P4
DCLK_P2_LPGBTS1_LPGBT: U1.T9
DCLK_P2_LPGBTS1_LPGBT1: U2.T9
DCLK_P3_LPGBTS1_LPGBT: U1.T10
DCLK_P3_LPGBTS1_LPGBT1: U2.T10
DCLK_P4_LPGBTS1_LPGBT: U1.P13
DCLK_P4_LPGBTS1_LPGBT1: U2.P13
DCLK_P5_LPGBTS1_LPGBT: U1.P14
DCLK_P5_LPGBTS1_LPGBT1: U2.P14
DCLK_P6_LPGBTS1_LPGBT: U1.T15
DCLK_P6_LPGBTS1_LPGBT1: U2.T15
DCLK_P7_LPGBTS1_LPGBT: U1.P15
DCLK_P7_LPGBTS1_LPGBT1: U2.P15
DCLK_P8_LPGBTS1_LPGBT: U1.N14
DCLK_P8_LPGBTS1_LPGBT1: U2.N14
DCLK_P9_LPGBTS1_LPGBT: U1.M14
DCLK_P9_LPGBTS1_LPGBT1: U2.M14
DCLK_P10_LPGBTS1_LPGBT: U1.L14
DCLK_P10_LPGBTS1_LPGBT1: U2.L14
DCLK_P11_LPGBTS1_LPGBT: U1.K16
DCLK_P11_LPGBTS1_LPGBT1: U2.K16
DCLK_P12_LPGBTS1_LPGBT: U1.J16
DCLK_P12_LPGBTS1_LPGBT1: U2.J16
DCLK_P13_LPGBTS1_LPGBT: U1.K14
DCLK_P13_LPGBTS1_LPGBT1: U2.K14
DCLK_P14_LPGBTS1_LPGBT: U1.J14
DCLK_P14_LPGBTS1_LPGBT1: U2.J14
DCLK_P15_LPGBTS1_LPGBT: U1.H14
DCLK_P15_LPGBTS1_LPGBT1: U2.H14
DCLK_P16_LPGBTS1_LPGBT: U1.G14
DCLK_P16_LPGBTS1_LPGBT1: U2.G14
DCLK_P17_LPGBTS1_LPGBT: U1.F14
DCLK_P17_LPGBTS1_LPGBT1: U2.F14
DCLK_P18_LPGBTS1_LPGBT: U1.E14
DCLK_P18_LPGBTS1_LPGBT1: U2.E14
DCLK_P19_LPGBTS1_LPGBT: U1.D16
DCLK_P19_LPGBTS1_LPGBT1: U2.D16
DCLK_P20_LPGBTS1_LPGBT: U1.D14
DCLK_P20_LPGBTS1_LPGBT1: U2.D14
DCLK_P21_LPGBTS1_LPGBT: U1.C16
DCLK_P21_LPGBTS1_LPGBT1: U2.C16
DCLK_P22_LPGBTS1_LPGBT: U1.B16
DCLK_P22_LPGBTS1_LPGBT1: U2.B16
DCLK_P23_LPGBTS1_LPGBT: U1.A16
DCLK_P23_LPGBTS1_LPGBT1: U2.A16
DCLK_P24_LPGBTS1_LPGBT: U1.C14
DCLK_P24_LPGBTS1_LPGBT1: U2.C14
DCLK_P25_LPGBTS1_LPGBT: U1.B15
DCLK_P25_LPGBTS1_LPGBT1: U2.B15
DCLK_P26_LPGBTS1_LPGBT: U1.D5
DCLK_P26_LPGBTS1_LPGBT1: U2.D5
DCLK_P27_LPGBTS1_LPGBT: U1.D4
DCLK_P27_LPGBTS1_LPGBT1: U2.D4
DIFFTESTOUT0_LPGBTS1_LPGBT: U1.F13
DIFFTESTOUT0_LPGBTS1_LPGBT1: U2.F13
DIFFTESTOUT0_N_LPGBTS1_LPGBT: U1.E12
DIFFTESTOUT0_N_LPGBTS1_LPGBT1: U2.E12
DIFFTESTOUT0_P_LPGBTS1_LPGBT: U1.E13
DIFFTESTOUT0_P_LPGBTS1_LPGBT1: U2.E13
DIFFTESTOUT1_LPGBTS1_LPGBT: U1.F12
DIFFTESTOUT1_LPGBTS1_LPGBT1: U2.F12
DIFFTESTOUT1_N_LPGBTS1_LPGBT: U1.E10
DIFFTESTOUT1_N_LPGBTS1_LPGBT1: U2.E10
DIFFTESTOUT1_P_LPGBTS1_LPGBT: U1.E11
DIFFTESTOUT1_P_LPGBTS1_LPGBT1: U2.E11
DIFFTESTOUT2_LPGBTS1_LPGBT: U1.F11
DIFFTESTOUT2_LPGBTS1_LPGBT1: U2.F11
DIFFTESTOUT3_LPGBTS1_LPGBT: U1.F10
DIFFTESTOUT3_LPGBTS1_LPGBT1: U2.F10
ELINK_I_MASTER_N0: J5.35 U1.U5
ELINK_I_MASTER_N1: J5.31 U1.U6
ELINK_I_MASTER_N2: J5.27 U1.U7
ELINK_I_MASTER_N3: J5.23 U1.U8
ELINK_I_MASTER_N4: J5.19 U1.U11
ELINK_I_MASTER_N5: J5.15 U1.U12
ELINK_I_MASTER_N6: J5.11 U1.U13
ELINK_I_MASTER_N7: J5.7 U1.U14
ELINK_I_MASTER_N8: J5.3 U1.P17
ELINK_I_MASTER_N9: J5.4 U1.N17
ELINK_I_MASTER_N10: J5.8 U1.M17
ELINK_I_MASTER_N11: J5.12 U1.L17
ELINK_I_MASTER_N12: J5.16 U1.H17
ELINK_I_MASTER_N13: J5.20 U1.G17
ELINK_I_MASTER_N14: J5.24 U1.F17
ELINK_I_MASTER_N15: J5.28 U1.E17
ELINK_I_MASTER_N16: J5.32 U1.A14
ELINK_I_MASTER_N17: J5.36 U1.A13
ELINK_I_MASTER_N18: J4.3 U1.A12
ELINK_I_MASTER_N19: J4.7 U1.A11
ELINK_I_MASTER_N20: J4.11 U1.A10
ELINK_I_MASTER_N21: J4.15 U1.A9
ELINK_I_MASTER_N22: J4.19 U1.A8
ELINK_I_MASTER_N23: J4.23 U1.A7
ELINK_I_MASTER_N24: J4.27 U1.A6
ELINK_I_MASTER_N25: J4.31 U1.A5
ELINK_I_MASTER_N26: J4.35 U1.A4
ELINK_I_MASTER_N27: J4.4 U1.A3
ELINK_I_MASTER_P0: J5.33 U1.T5
ELINK_I_MASTER_P1: J5.29 U1.T6
ELINK_I_MASTER_P2: J5.25 U1.T7
ELINK_I_MASTER_P3: J5.21 U1.T8
ELINK_I_MASTER_P4: J5.17 U1.T11
ELINK_I_MASTER_P5: J5.13 U1.T12
ELINK_I_MASTER_P6: J5.9 U1.T13
ELINK_I_MASTER_P7: J5.5 U1.T14
ELINK_I_MASTER_P8: J5.1 U1.P16
ELINK_I_MASTER_P9: J5.2 U1.N16
ELINK_I_MASTER_P10: J5.6 U1.M16
ELINK_I_MASTER_P11: J5.10 U1.L16
ELINK_I_MASTER_P12: J5.14 U1.H16
ELINK_I_MASTER_P13: J5.18 U1.G16
ELINK_I_MASTER_P14: J5.22 U1.F16
ELINK_I_MASTER_P15: J5.26 U1.E16
ELINK_I_MASTER_P16: J5.30 U1.B14
ELINK_I_MASTER_P17: J5.34 U1.B13
ELINK_I_MASTER_P18: J4.1 U1.B12
ELINK_I_MASTER_P19: J4.5 U1.B11
ELINK_I_MASTER_P20: J4.9 U1.B10
ELINK_I_MASTER_P21: J4.13 U1.B9
ELINK_I_MASTER_P22: J4.17 U1.B8
ELINK_I_MASTER_P23: J4.21 U1.B7
ELINK_I_MASTER_P24: J4.25 U1.B6
ELINK_I_MASTER_P25: J4.29 U1.B5
ELINK_I_MASTER_P26: J4.33 U1.B4
ELINK_I_MASTER_P27: J4.2 U1.B3
ELINK_I_SLAVE_N0: J5.86 U2.U5
ELINK_I_SLAVE_N1: J5.82 U2.U6
ELINK_I_SLAVE_N2: J5.78 U2.U7
ELINK_I_SLAVE_N3: J5.74 U2.U8
ELINK_I_SLAVE_N4: J5.70 U2.U11
ELINK_I_SLAVE_N5: J5.66 U2.U12
ELINK_I_SLAVE_N6: J5.62 U2.U13
ELINK_I_SLAVE_N7: J5.58 U2.U14
ELINK_I_SLAVE_N8: J5.54 U2.P17
ELINK_I_SLAVE_N9: J5.85 U2.N17
ELINK_I_SLAVE_N10: J5.81 U2.M17
ELINK_I_SLAVE_N11: J5.77 U2.L17
ELINK_I_SLAVE_N12: J5.73 U2.H17
ELINK_I_SLAVE_N13: J5.69 U2.G17
ELINK_I_SLAVE_N14: J5.65 U2.F17
ELINK_I_SLAVE_N15: J5.61 U2.E17
ELINK_I_SLAVE_N16: J5.57 U2.A14
ELINK_I_SLAVE_N17: J5.53 U2.A13
ELINK_I_SLAVE_N18: J4.53 U2.A12
ELINK_I_SLAVE_N19: J4.57 U2.A11
ELINK_I_SLAVE_N20: J4.61 U2.A10
ELINK_I_SLAVE_N21: J4.65 U2.A9
ELINK_I_SLAVE_N22: J4.69 U2.A8
ELINK_I_SLAVE_N23: J4.73 U2.A7
ELINK_I_SLAVE_N24: J4.77 U2.A6
ELINK_I_SLAVE_N25: J4.81 U2.A5
ELINK_I_SLAVE_N26: J4.85 U2.A4
ELINK_I_SLAVE_N27: J4.100 U2.A3
ELINK_I_SLAVE_P0: J5.84 U2.T5
ELINK_I_SLAVE_P1: J5.80 U2.T6
ELINK_I_SLAVE_P2: J5.76 U2.T7
ELINK_I_SLAVE_P3: J5.72 U2.T8
ELINK_I_SLAVE_P4: J5.68 U2.T11
ELINK_I_SLAVE_P5: J5.64 U2.T12
ELINK_I_SLAVE_P6: J5.60 U2.T13
ELINK_I_SLAVE_P7: J5.56 U2.T14
ELINK_I_SLAVE_P8: J5.52 U2.P16
ELINK_I_SLAVE_P9: J5.83 U2.N16
ELINK_I_SLAVE_P10: J5.79 U2.M16
ELINK_I_SLAVE_P11: J5.75 U2.L16
ELINK_I_SLAVE_P12: J5.71 U2.H16
ELINK_I_SLAVE_P13: J5.67 U2.G16
ELINK_I_SLAVE_P14: J5.63 U2.F16
ELINK_I_SLAVE_P15: J5.59 U2.E16
ELINK_I_SLAVE_P16: J5.55 U2.B14
ELINK_I_SLAVE_P17: J5.51 U2.B13
ELINK_I_SLAVE_P18: J4.51 U2.B12
ELINK_I_SLAVE_P19: J4.55 U2.B11
ELINK_I_SLAVE_P20: J4.59 U2.B10
ELINK_I_SLAVE_P21: J4.63 U2.B9
ELINK_I_SLAVE_P22: J4.67 U2.B8
ELINK_I_SLAVE_P23: J4.71 U2.B7
ELINK_I_SLAVE_P24: J4.75 U2.B6
ELINK_I_SLAVE_P25: J4.79 U2.B5
ELINK_I_SLAVE_P26: J4.83 U2.B4
ELINK_I_SLAVE_P27: J4.98 U2.B3
ELINK_O_MASTER_P0: J5.37
ELINK_O_MASTER_P4: J5.38
ELINK_O_MASTER_P5: J4.37
ELINK_O_MASTER_P8: J5.88
ELINK_O_MASTER_P12: J5.87
ELINK_O_MASTER_P13: J4.87
ELINK_O_N0_LPGBTS1: U1.R5
ELINK_O_N0_LPGBTS1_LPGBT1: U2.R5
ELINK_O_N1_LPGBTS1: U1.R6
ELINK_O_N1_LPGBTS1_LPGBT1: U2.R6
ELINK_O_N2_LPGBTS1: U1.R7
ELINK_O_N2_LPGBTS1_LPGBT1: U2.R7
ELINK_O_N3_LPGBTS1: U1.R8
ELINK_O_N3_LPGBTS1_LPGBT1: U2.R8
ELINK_O_N4_LPGBTS1: U1.R9
ELINK_O_N4_LPGBTS1_LPGBT1: U2.R9
ELINK_O_N5_LPGBTS1: U1.R10
ELINK_O_N5_LPGBTS1_LPGBT1: U2.R10
ELINK_O_N6_LPGBTS1: U1.R11
ELINK_O_N6_LPGBTS1_LPGBT1: U2.R11
ELINK_O_N7_LPGBTS1: U1.R12
ELINK_O_N7_LPGBTS1_LPGBT1: U2.R12
ELINK_O_N8_LPGBTS1: U1.C13
ELINK_O_N8_LPGBTS1_LPGBT1: U2.C13
ELINK_O_N9_LPGBTS1: U1.C12
ELINK_O_N9_LPGBTS1_LPGBT1: U2.C12
ELINK_O_N10_LPGBTS1: U1.C11
ELINK_O_N10_LPGBTS1_LPGBT1: U2.C11
ELINK_O_N11_LPGBTS1: U1.C10
ELINK_O_N11_LPGBTS1_LPGBT1: U2.C10
ELINK_O_N12_LPGBTS1: U1.C9
ELINK_O_N12_LPGBTS1_LPGBT1: U2.C9
ELINK_O_N13_LPGBTS1: U1.C8
ELINK_O_N13_LPGBTS1_LPGBT1: U2.C8
ELINK_O_N14_LPGBTS1: U1.C7
ELINK_O_N14_LPGBTS1_LPGBT1: U2.C7
ELINK_O_N15_LPGBTS1: U1.C6
ELINK_O_N15_LPGBTS1_LPGBT1: U2.C6
ELINK_O_P0_LPGBTS1: U1.P5
ELINK_O_P0_LPGBTS1_LPGBT1: U2.P5
ELINK_O_P1_LPGBTS1: U1.P6
ELINK_O_P1_LPGBTS1_LPGBT1: U2.P6
ELINK_O_P2_LPGBTS1: U1.P7
ELINK_O_P2_LPGBTS1_LPGBT1: U2.P7
ELINK_O_P3_LPGBTS1: U1.P8
ELINK_O_P3_LPGBTS1_LPGBT1: U2.P8
ELINK_O_P4_LPGBTS1: U1.P9
ELINK_O_P4_LPGBTS1_LPGBT1: U2.P9
ELINK_O_P5_LPGBTS1: U1.P10
ELINK_O_P5_LPGBTS1_LPGBT1: U2.P10
ELINK_O_P6_LPGBTS1: U1.P11
ELINK_O_P6_LPGBTS1_LPGBT1: U2.P11
ELINK_O_P7_LPGBTS1: U1.P12
ELINK_O_P7_LPGBTS1_LPGBT1: U2.P12
ELINK_O_P8_LPGBTS1: U1.D13
ELINK_O_P8_LPGBTS1_LPGBT1: U2.D13
ELINK_O_P9_LPGBTS1: U1.D12
ELINK_O_P9_LPGBTS1_LPGBT1: U2.D12
ELINK_O_P10_LPGBTS1: U1.D11
ELINK_O_P10_LPGBTS1_LPGBT1: U2.D11
ELINK_O_P11_LPGBTS1: U1.D10
ELINK_O_P11_LPGBTS1_LPGBT1: U2.D10
ELINK_O_P12_LPGBTS1: U1.D9
ELINK_O_P12_LPGBTS1_LPGBT1: U2.D9
ELINK_O_P13_LPGBTS1: U1.D8
ELINK_O_P13_LPGBTS1_LPGBT1: U2.D8
ELINK_O_P14_LPGBTS1: U1.D7
ELINK_O_P14_LPGBTS1_LPGBT1: U2.D7
ELINK_O_P15_LPGBTS1: U1.D6
ELINK_O_P15_LPGBTS1_LPGBT1: U2.D6
GPIO0: J3.14 J5.41 U1.N13
GPIO0_LPGBTS1_LPGBT1: U2.N13
GPIO1: J3.16 U1.N12
GPIO1_608069: J4.41 J4.91
GPIO1_LPGBTS1_LPGBT1: U2.N12
GPIO2: U1.M11
GPIO2_LPGBTS1_LPGBT1: U2.M11
GPIO3: J5.42 U1.N11
GPIO3_LPGBTS1_LPGBT1: U2.N11
GPIO4: J5.92 U1.M10
GPIO4_LPGBTS1_LPGBT1: U2.M10
GPIO5: U1.N10
GPIO5_LPGBTS1_LPGBT1: U2.N10
GPIO6: U1.L9
GPIO6_LPGBTS1_LPGBT1: U2.L9
GPIO7: U1.M9
GPIO7_LPGBTS1_LPGBT1: U2.M9
GPIO8: U1.N9
GPIO8_LPGBTS1_LPGBT1: U2.N9
GPIO9: U1.L8
GPIO9_LPGBTS1_LPGBT1: U2.L8
GPIO10: U1.M8
GPIO10_LPGBTS1_LPGBT1: U2.M8
GPIO11: U1.N8
GPIO11_LPGBTS1_LPGBT1: U2.N8
GPIO12: U1.L7
GPIO12_LPGBTS1_LPGBT1: U2.L7
GPIO13: U1.L6
GPIO13_LPGBTS1_LPGBT1: U2.L6
GPIO14: U1.L5
GPIO14_LPGBTS1_LPGBT1: U2.L5
GPIO15: U1.R3
GPIO15_LPGBTS1_LPGBT1: U2.R3
HARDRST_LPGBTS1_LPGBT: U1.T2
HARDRST_LPGBTS1_LPGBT1: U2.T2
I2C_ADR0: U1.E9
I2C_ADR0_LPGBTS1_LPGBT1: U2.E9
I2C_ADR1: U1.F9
I2C_ADR1_LPGBTS1_LPGBT1: U2.F9
I2C_ADR2: U1.E8
I2C_ADR2_LPGBTS1_LPGBT1: U2.E8
I2C_ADR3: U1.F8
I2C_ADR3_LPGBTS1_LPGBT1: U2.F8
MASTER_CLOCK_N0_LPGBTS1: U1.N5
MASTER_CLOCK_N1_BASEBOARD: J5.48
MASTER_CLOCK_N1_LPGBTS1: U1.N6
MASTER_CLOCK_N2_BASEBOARD: J4.47
MASTER_CLOCK_N2_LPGBTS1: U1.N7
MASTER_CLOCK_P0_BASEBOARD: J5.45
MASTER_CLOCK_P0_LPGBTS1: U1.M5
MASTER_CLOCK_P1_BASEBOARD: J5.46
MASTER_CLOCK_P1_LPGBTS1: U1.M6
MASTER_CLOCK_P2_BASEBOARD: J4.45
MASTER_CLOCK_P2_LPGBTS1: U1.M7
MASTER_TX_N: J3.13 U1.G1
MASTER_TX_P: J3.15 U1.H1
MODE0: U1.G5
MODE0_LPGBTS1_LPGBT1: U2.G5
MODE1: U1.K5
MODE1_LPGBTS1_LPGBT1: U2.K5
MODE2: U1.P3
MODE2_LPGBTS1_LPGBT1: U2.P3
MODE3: U1.P2
MODE3_LPGBTS1_LPGBT1: U2.P2
N126329_LPGBTS1_LPGBT: U1.E7
N126329_LPGBTS1_LPGBT1: U2.E7
N126331_LPGBTS1_LPGBT: U1.E6
N126331_LPGBTS1_LPGBT1: U2.E6
N126333_LPGBTS1_LPGBT: U1.E5
N126333_LPGBTS1_LPGBT1: U2.E5
N126373_LPGBTS1_LPGBT: U1.F7
N126373_LPGBTS1_LPGBT1: U2.F7
N126375_LPGBTS1_LPGBT: U1.F6
N126375_LPGBTS1_LPGBT1: U2.F6
N126377_LPGBTS1_LPGBT: U1.F5
N126377_LPGBTS1_LPGBT1: U2.F5
PORDISABLE_LPGBTS1_LPGBT: U1.T1
PORDISABLE_LPGBTS1_LPGBT1: U2.T1
READY_LPGBTS1_LPGBT: U1.R2
READY_LPGBTS1_LPGBT1: U2.R2
REFCLK_N: U1.N4 U2.P1
REFCLK_N_LPGBTS1_LPGBT: U1.P1
REFCLK_P: U1.M4 U2.R1
REFCLK_P_LPGBTS1_LPGBT: U1.R1
RESETB_LPGBTS1_LPGBT: C1.1 U1.D3
RESETB_LPGBTS1_LPGBT1: U2.D3
RX_N: J3.7 U1.M1
RX_N_LPGBTS1_LPGBT1: U2.M1
RX_P: J3.9 U1.L1
RX_P_LPGBTS1_LPGBT1: U2.L1
RXLOCKMODE_LPGBTS1_LPGBT: U1.E1
RXLOCKMODE_LPGBTS1_LPGBT1: U2.E1
SCCLK_N_LPGBTS1_LPGBT: U1.U16
SCCLK_N_LPGBTS1_LPGBT1: U2.U16
SCCLK_P_LPGBTS1_LPGBT: U1.T16
SCCLK_P_LPGBTS1_LPGBT1: U2.T16
SCIN_N: U1.U17
SCIN_P: U1.T17
SCL_MASTER0: J3.10
SCOUT_N: U2.R17
SCOUT_P: U2.R16
SDA_MASTER0: J3.8
SLAVE_CLOCK_N0_LPGBTS1: U2.D2 U2.M4 U2.M5 U2.M6 U2.M7 U2.N4 U2.N5 U2.N6 U2.N7
SLAVE_CLOCK_N1: J5.97
SLAVE_CLOCK_N2: J4.97
SLAVE_CLOCK_P0: J5.96
SLAVE_CLOCK_P1: J5.95
SLAVE_CLOCK_P2: J4.95
SLAVE_TX_N: J3.19 U2.G1
SLAVE_TX_P: J3.21 U2.H1
SLOW_CONTROL_N: U1.R17 U2.U17
SLOW_CONTROL_P: U1.R16 U2.T17
STATEOVERRIDE_LPGBTS1_LPGBT: U1.E2
STATEOVERRIDE_LPGBTS1_LPGBT1: U2.E2
TESTCLKINN_LPGBTS1_LPGBT: U1.L4
TESTCLKINN_LPGBTS1_LPGBT1: U2.L4
TESTCLKINP_LPGBTS1_LPGBT: U1.K4
TESTCLKINP_LPGBTS1_LPGBT1: U2.K4
TH1: J3.32
TH2: J3.34
TX3N: J3.25
TX3P: J3.27
TX4N: J3.31
TX4P: J3.33
VREF: U1.H4 U1.J4 U2.H4 U2.J4
N222886: J4.8 U1.J10 U1.K10
N227704: J4.10 U1.U2
N227716: J4.12 U1.U3
N227728: J4.6 U1.T3
N227740: J4.92 U2.J10 U2.K10
N227752: J4.94 U2.U2
N227764: J4.96 U2.U3
N227776: J4.90 U2.T3
N607541: J5.39
N607593: J5.47
N610081: J5.40
N612232: J5.90
N612284: J5.98
N616638: J4.39
N616968: J4.89

Pads without a net: J3 1 2 3 20 22 26 28 37 38 39 40; J5 89 91 93 100; NOREF#3 1; NOREF#4 1; NOREF#5 1; NOREF#6 1; U1 U1; U2 U1

## Routing (per net, layer and track width the routed paths; a pad name or vN(x,y) marks a point on that pad's centre or on a via; arc(x,y) is an arc through that point)
ADC_IN0_LPGBTS1_LPGBT1: length 1
  TOP w0.082: 3.5,10 3.5,10.01 3.5,11.01
ADC_IN1_LPGBTS1_LPGBT1: length 0.7
  TOP w0.082: U2.A1 2.5,10.5
ADC_IN2_LPGBTS1_LPGBT1: length 0
  TOP w0.082: 3.5,11.49 3.5,11.5
ADC_IN6_LPGBTS1_LPGBT1: length 1
  TOP w0.07: U2.C1 2,12 2,12
ADC_IN7_LPGBTS1_LPGBT1: length 1
  TOP w0.07: 2,12.5 2.01,12.51 U2.D1
ELINK_I_SLAVE_N25: length 1
  TOP w0.07: 5,10 5,11.01 U2.A5
ELINK_I_SLAVE_N26: length 1
  TOP w0.07: 4.5,10 4.5,11 4.51,11.01
ELINK_I_SLAVE_N27: length 1
  TOP w0.07: 4,10 4,11.01 4,11.01
ELINK_I_SLAVE_P24: length 0.3
  TOP w0.07: U2.B6 5.5,11.24
ELINK_I_SLAVE_P25: length 0.4
  TOP w0.07: U2.B5 4.99,11.36 5.18,11.18
ELINK_I_SLAVE_P26: length 0.5
  TOP w0.07: U2.B4 4.51,11.34 4.28,11.11
ELINK_I_SLAVE_P27: length 0.4
  TOP w0.07: U2.B3 4,11.34 3.83,11.17
I2C_ADR1_LPGBTS1_LPGBT1: length 0
